# Altium PCB My_PCB.PcbDoc (part 2 of 2)
Units mil, origin at the board's own origin, x right, y up, seen from the top; angles counter-clockwise.
Board outline 2405.51 x 3023.62 mil, 6 copper layers (L1 HS signal, L2 GND, L3 Signal, L4 5V, L5 Signal, L6 Signal), stack 61.068 mil thick; 56 components, 70 nets, 272 pads, 60 vias.
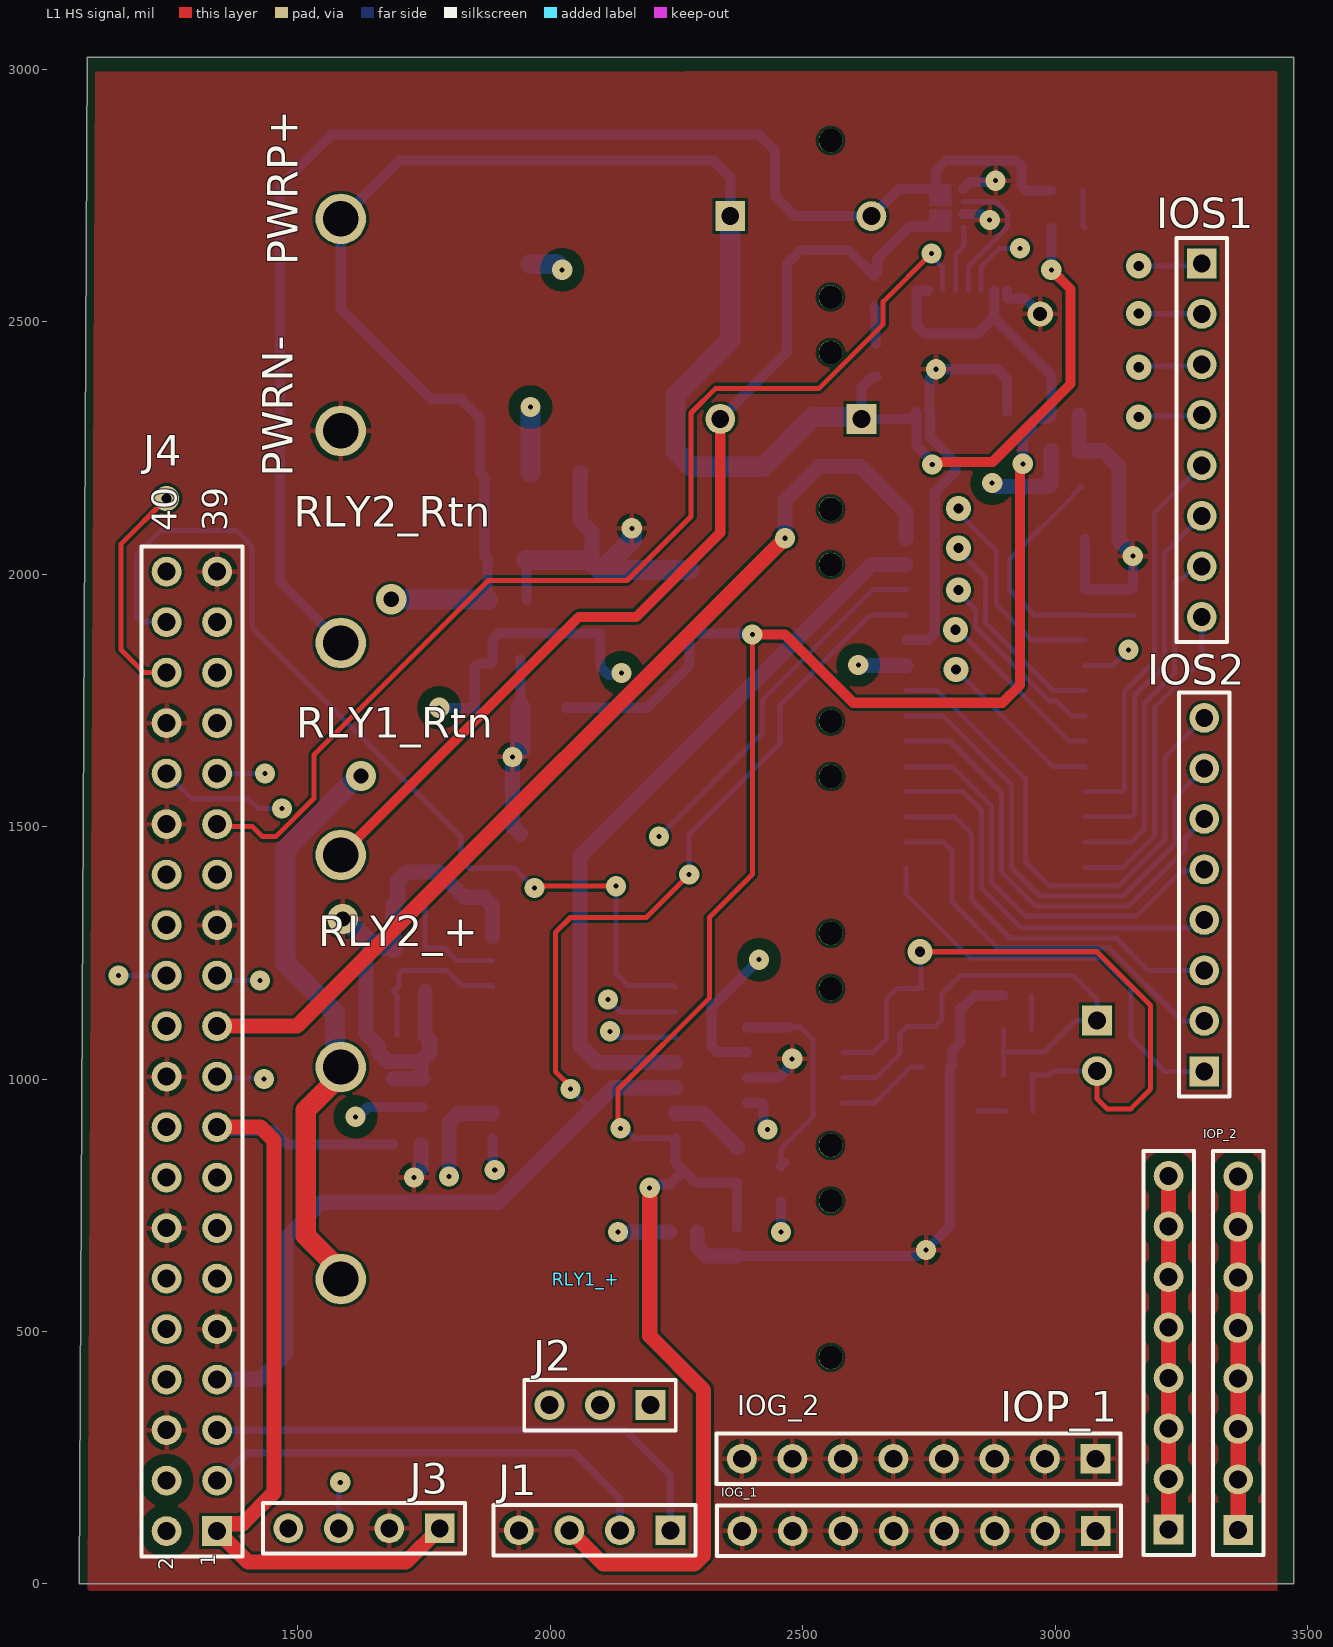
[diagram p0: L1 HS signal view]

## Part data (continued)
UC2: library part CMP-0186-00038-2, "High-Speed CAN Transceiver, 8-Pin SOIC, Extended Temperature", Code_IPC=SOIC127P600-8, Code_JEDEC=MS-012, ComponentLink1Description="Manufacturer URL", ComponentLink1URL=http://www.microchip.com/, ComponentLink2Description=Datasheet, ComponentLink2URL=http://ww1.microchip.com/downloads/en/DeviceDoc/21667F.pdf, ComponentLink3Description="Package Specification", ComponentLink3URL=http://www.microchip.com/stellent/groups/techpub_sg/documents/packagingspec/en012702.pdf, DatasheetVersion="revF, Jul-2010", PackageDescription="8-Lead Plastic Small Outline (SN) - Narrow, 3.90mm Body [SOIC]", PackageReference=SOIC-SN8, PackageVersion="revBB, Aug-2009", RevisionNote="URLs added. DatasheetVersion updated."
UI1: library part CMP-0186-00131-2, "16-Bit I/O Expander with Serial Interface, 28-Pin SOIC, Extended Temperature, Tape and Reel", Code_JEDEC=MS-013, ComponentLink1Description="Manufacturer URL", ComponentLink1URL=http://www.microchip.com/, ComponentLink2Description=Datasheet, ComponentLink2URL=http://ww1.microchip.com/downloads/en/DeviceDoc/21952b.pdf, ComponentLink3Description="Package Specification", ComponentLink3URL=http://www.microchip.com/stellent/groups/techpub_sg/documents/packagingspec/en012702.pdf, DatasheetVersion="revB, Feb-2007", PackageDescription="28-Lead Plastic Small Outline (SO) - Wide 7.50mm Body [SOIC]", PackageReference=SOIC-SO28, PackageVersion="revBB, Aug-2009", RevisionNote="URLs added. Sch pin type corrected."
X1: library part CMP-0464-00001-2, "Crystal, 16 MHz, -30 to 85 degC, 3.2 x 2.5 x 0.9 mm SMD", Frequency Tolerance="+/-20 ppm", Load Capacitance="10 pF", Manufacturer=ITTI, Nominal Frequency="16 MHz", Operating Temperature="-30 to 85 degC", ComponentLink1Description="Manufacturer URL", ComponentLink1URL=http://www.itti-co.com, Drive Level="100 max. uw", Mounting Technology="Surface Mount", Overtone order=Fundamental, PackageDescription="4-Pin Hand Drawn, Body 3.2 x 2.5mm", PackageReference=21C00047-16.000MHz-4, PartNumber=21C00047-16.000MHz

## Via types
v1: diameter 40, hole 10, L1 HS signal to L6 Signal, 45 vias
v2: diameter 50, hole 20, L1 HS signal to L6 Signal, 11 vias
v3: diameter 60, hole 30, L1 HS signal to L6 Signal, 3 vias
v4: diameter 50, hole 28, L1 HS signal to L6 Signal, 1 vias

## Nets (pads, with @x,y where several pads share a name; then routed paths per layer and width w, separated by ;. In a path a pad name is that pad's centre, name@x,y a point inside that pad or via, vN(x,y) a via of type N, cw(c..) or ccw(c..) an arc to the next point about the centre after c; other vN are vias at no path point)
3V3: C1.2 C6.2 C7.1 C33.2 J1.3 J3.1 J4.1 J4.17 R1.2 Reg3.3 U1.1 U1.2 U1.7 UC1.18 | length 6984.3
  L1 HS signal w10: v1(2138.99,902.44) 2134.14,907.29 2134.14,979.14 2315,1160 2315,1320 2400,1405 v1(2400,1880)
  L1 HS signal w20: v1(2400,1880) 2465,1880 2600,1745 2895,1745 2930,1780 2930,2212.61 v1(2935.67,2218.28)
  L1 HS signal w30: J4.17 1425.98,904.72 1452.76,877.95 1452.76,181.1 1390.91,119.25 1354.69,119.25 J4.1 1401.57,43.31 1714.17,43.31 J3.1 ; J1.3 2104.72,39.37 2285.58,39.37 2303.15,56.94 2303.15,384.47 2196.85,490.77 v1(2196.85,784.5)
  L3 Signal w20: J3.1 1848.03,43.31 1988.19,43.31 2002.33,57.45 2002.33,60.27 2037.8,95.73 J1.3
  L6 Signal w10: v1(2138.99,902.44) 2147.11,902.44 2166.87,882.68 UC1.18
  L6 Signal w20: J4.17 1347.24,897.64 1452.76,897.64 1480.31,870.08 C6.2 ; Reg3.3 2191.93,1735.24 2275.59,1818.9 C7.1 2398.11,1881.89 v1(2400,1880) ; v1(2196.85,784.5) 2196.85,791.34 2236.22,791.34 2263.78,818.9 ; UC1.18 2248.03,834.65 2263.78,818.9 ; C33.2 R1.2 2287.4,795.28 2263.78,818.9 ; U1.2@2747.72,2561.02 U1.1 2725.39,2491.14 2740.16,2476.38 2846.46,2476.38 2877.95,2507.87 ; U1.7 2878.94,2508.86 2877.95,2507.87 ; v1(2935.67,2218.28) 2935.67,2270.67 2955,2290 2955,2303.24 2959,2307.24 2988.35,2307.24 2992.13,2311.02 C1.2 2992.13,2393.7 2877.95,2507.87
5V: C2.2 C5.2 C8.1 C9.2 C51.2 IOP_1.1 IOP_1.2 IOP_1.3 IOP_1.4 IOP_1.5 IOP_1.6 IOP_1.7 IOP_1.8 IOP_2.1 IOP_2.2 IOP_2.3 IOP_2.4 IOP_2.5 IOP_2.6 IOP_2.7 IOP_2.8 J4.2 J4.4 R4.1 Reg3.1 Reg5.2 Reg5.4 UC2.3 UI1.9 | length 2878
  L1 HS signal w30: IOP_1.1 IOP_1.2 IOP_1.3 IOP_1.4 IOP_1.5 IOP_1.6 IOP_1.7 IOP_1.8 ; IOP_2.1 IOP_2.2 IOP_2.3 IOP_2.4 IOP_2.5 IOP_2.6 IOP_2.7 IOP_2.8
  L6 Signal w20: v1(1614.17,925.2) 1619.59,925.2 1639.27,944.88 C5.2 C51.2 ; v1(1780,1735) 1850.16,1735 Reg3.1 1850.39,1814.96 1858.42,1822.99 1882.05,1822.99 1885.83,1826.77 C9.2 1885.83,1870.08 1899.17,1883.43 1988.13,1883.43 1989.66,1881.89 C8.1 2098.43,1816.57 2115,1800 2115.46,1800.46 2136.89,1800.46 v1(2140.71,1804.29) ; UC2.3 2389.07,1053.25 2330.62,1053.25 2318.9,1064.97 2318.9,1141.73 v1(2413.39,1236.22)
  L6 Signal w30: v1(2610,1820) 2610.91,1819.09 UI1.9 ; v1(2875,2180) 2877.71,2180 2884.48,2173.23 R4.1 2987.12,2173.23 2992.12,2178.23 C2.2
  L6 Signal w40: Reg5.2 v1(1960.63,2330.71) ; Reg5.4 2011.81,2614.17 v1(2023.62,2602.36)
12V: C3.2 C4.2 DI1.2 DI2.2 PWRP+.1 Reg5.3 RL1.2 RL2.2 RLY1_+.1 RLY2_+.1 U1.16 | length 5475.5
  L1 HS signal w20: v1(2756.39,2217.02) 2760.97,2221.6 2875.14,2221.6 3030,2376.46 3030,2564.49 v1(2992.13,2602.36)
  L1 HS signal w40: RLY1_+.1 1585.12,620.06 1515.75,689.43 1515.75,938.1 1585.12,1007.47 RLY2_+.1
  L3 Signal w40: v3(1625,1600) 1685,1660 v3(1685,1950)
  L6 Signal w20: C3.2@1875.98,1948.82 1875.98,2025.59 C4.2 1869.29,2036.22 1869.29,2192.13 Reg5.3 1860.63,2308.66 1822.83,2346.46 1763.78,2346.46 1585.12,2525.12 PWRP+.1 1700.75,2818.9 2322.83,2818.9 2356.3,2785.43 DI2.2 ; RL1.2 2636.81,2389.76 2616.14,2369.09 DI1.2 2711.61,2307.09 U1.16@2722.13,2317.6 ; U1.16 2725.39,2253.44 2756.39,2222.44 v1(2756.39,2217.02) ; v1(2992.13,2602.36) RL2.2
  L6 Signal w40: RLY2_+.1 1573.64,1035.19 1573.64,1131.43 1475,1230.06 1475,1455 1620,1600 v3(1625,1600) ; v3(1685,1950) 1685.59,1949.41 1875.39,1949.41 C3.2@1875.98,1948.82 ; DI2.2 2356.3,2462.6 2248.03,2354.33 2248.03,2244.09 2279.53,2212.6 2421.26,2212.6 2519.69,2311.02 2612.2,2311.02 DI1.2
AUX_CL: J2.1
AUX_DA: J2.3
C\S\: J3.3 J4.24 | length 1483.9
  L3 Signal w10: v1(1145,1205) 1145,990 1180,955 1369.14,955 1400,924.14 1400,385.48 v1(1584.07,201.42)
  L6 Signal w10: v1(1145,1205) 1145.14,1204.86 1240.02,1204.86 J4.24 ; J3.3 1581.1,198.46 v1(1584.07,201.42)
CAN_RXD: R2.2 R3.1 UC1.2 | length 1151.1
  L3 Signal w20: v1(2133.86,696.85) 2208.66,622.05 2417.32,622.05 2456.69,661.42 v1(2456.69,696.85)
  L3 Signal w30: v1(1799.21,807.09) 1909.45,696.85 v1(2133.86,696.85)
  L6 Signal w20: v1(2456.69,696.85) R3.1
  L6 Signal w30: v1(1799.21,807.09) 1799.21,913.39 1817.28,931.46 1884.61,931.46 UC1.2 ; v1(2133.86,696.85) R2.2
CAN_TXD: UC1.1 UC2.1 | length 724.6
  L3 Signal w20: v1(1890,820) 2350,820 v1(2430,900)
  L6 Signal w20: UC1.1 1885.83,824.17 v1(1890,820) ; UC2.1 2420.28,952.56 2421.95,950.89 2421.95,913.46 2430,905.41 v1(2430,900)
CANH: DioCAN1.1 P1.1 RCH1.2 RT1.2 UC2.7 | length 1003.5
  L6 Signal w10: UC2.7 2644.29,1002.56 2692.91,1051.18 2692.91,1090.55 2706.69,1104.33 DioCAN1.1 2761.81,1104.33 2775.59,1118.11 2775.59,1169.29 2811.02,1204.72 3035.43,1204.72 3082.68,1157.48 P1.1 3040.94,1115.75 2978.35,1053.15 2897.64,1053.15 ; RT1.2 2897.64,1053.15 ; RCH1.2 2897.64,1053.15
CANL: DioCAN1.2 P1.2 RCL1.2 RT1.1 UC2.6 | length 1388.1
  L1 HS signal w10: v2(2732.28,1251.97) 3082.68,1251.97 3188.98,1145.67 3188.98,980.32 3149.61,940.94 3102.36,940.94 3082.68,960.63 P1.2
  L6 Signal w10: UC2.6 2639.17,1052.56 2665.35,1078.74 2665.35,1157.48 2687.01,1179.13 DioCAN1.2 2734.25,1181.1 2734.25,1250 v2(2732.28,1251.97) ; RCL1.2 2954.73,938.98 2954.73,1005.9 RT1.1 2988.19,1007.87 2996.06,1015.75 P1.2
CLK_N: J1.1 J4.5 | length 1043.5
  L6 Signal w15: J4.5 2148.03,304.72 2237.8,214.96 J1.1
CLK_P: J1.2 J4.3 | length 921.1
  L6 Signal w15: J4.3 1343.41,204.72 1398.69,260 2047.09,260 2137.8,169.29 J1.2
FSYNC: J2.2
GND: C1.1 C2.1 C3.1 C4.1 C5.1 C6.1 C7.2 C8.2 C9.1 C33.1 C51.1 CH1.2 CL1.1 CO1.1 CO2.2 Crst1.1 DioCAN1.3 IOG_1.1 IOG_1.2 IOG_1.3 IOG_1.4 IOG_1.5 IOG_1.6 IOG_1.7 IOG_1.8 IOG_2.1 IOG_2.2 IOG_2.3 IOG_2.4 IOG_2.5 IOG_2.6 IOG_2.7 IOG_2.8 J1.4 J3.2 J4.6 J4.9 J4.14 J4.20 J4.25 J4.30 J4.34 J4.39 PWRN-.1 Q1.1 Q1.3 R2.1 RCAN1.1 Reg3.2 Reg3.4 Reg5.1 U1.8 U1.9 U1.15 UC1.9 UC2.2 UI1.10 UI1.15 UI1.16 UI1.17 X1.2 X1.4 | length 5142
  L6 Signal w20: X1.2@1751.97,1169.29 X1.2 ; Reg3.2 C9.1 ; C3.1 C4.1 ; C33.1 2726.87,649.61 2738.68,661.42 v1(2744.09,661.42) 2791.34,708.66 CL1.1 RCAN1.1 2795.12,1027.4 2795.12,1054.96 2811.02,1070.87 2811.02,1137.8 2811.18,1137.95 2811.18,1139.92 2812.99,1141.73 DioCAN1.3 2816.93,1141.73 2840.55,1165.35 CH1.2 ; UC2.2 2390.46,1003.25 2452.8,1003.25 2479,1029.45 v1(2479,1040) ; UI1.10 2705.42,1869.79 2748.43,1869.79 2761.26,1882.62 2761.26,2162.84 2802.74,2204.31 2802.74,2220.88 2752.13,2271.5 2752.13,2319.73 U1.15 2750.98,2387.3 2763.78,2400.1 v1(2763.78,2405.51) 2885.83,2405.51 2904.53,2386.81 U1.9 ; Q1.3 2852.86,2712.6 2864.67,2700.79 v1(2870.08,2700.79) v1@2870.08,2704.72 ; Q1.1 2831.89,2776.69 2879.68,2776.69 v1(2881.89,2778.9) ; U1.8 2904.53,2546.88 2905.67,2545.74 2939.26,2545.74 v4(2970,2515) ; UI1.15 UI1.16 UI1.17 3059.75,1969.79 3150.89,1969.79 Crst1.1 v1(3153.54,2035.43)
  L6 Signal w30: C5.1 C51.1 1746.54,1000 1745.31,1001.22 1745.31,1002.72 1743.58,1004.45 1743.58,1035 ; X1.4 1652.57,1259.84 1635,1242.27 1635,1090 1660,1065 1660,1052.57 1677.57,1035 1743.58,1035 ; X1.4@1688.98,1263.78 1688.98,1344.96 1696.85,1352.83 CO2.2 1698.07,1355.55 1698.07,1392.43 1715.64,1410 1780,1410 1830,1360 1868.25,1360 1885.83,1342.43 UC1.9 ; v1(1730,805) 1730,807.71 1744.1,821.8 C6.1 ; X1.2 1751.97,1169.29 CO1.1 1761.16,1077.43 1761.16,1052.57 1743.58,1035 ; v1(1925.2,1637.8) 1925.2,1500.98 Reg3.4 ; Reg5.1 2059.06,2199.21 2059.06,2106.3 2082.68,2082.68 C8.2@2082.68,2023.62 ; R2.1 2291.34,667.18 2308.91,649.61 C33.1 ; C1.1 C2.1 3094.49,2244.09 3125.98,2212.6 3125.98,2065.7 3153.54,2038.14 v1(3153.54,2035.43)
  L6 Signal w40: v3(1589,1317) 1594.41,1317 1644.01,1267.4 1685.35,1267.4 1688.98,1263.78 X1.4 ; v1(1925.2,1637.8) 1940.94,1653.54 Reg3.2 ; C4.1 2074.8,2027.56 C8.2@2078.74,2023.62 ; v1(2161.42,2090.55) 2161.42,2066.93 2102.36,2007.87 C8.2 C7.2
GPIO4: J4.7 UC1.16 UI1.11 | length 2707.4
  L1 HS signal w10: v1(2040,980) 2040,985 2010,1015 2010,1290 2040,1320 2190,1320 v1(2275,1405)
  L6 Signal w10: v1(2040,980) 2080.87,939.13 ; v1(2275,1405) 2275,1485 2455,1665 2455,1740 2634.09,1919.09 UI1.11
  L6 Signal w30: J4.7 1340.94,405.51 1425.2,405.51 1476.38,456.69 1476.38,685.04 1547.24,755.91 1897.64,755.91 2080.87,939.13 2124.41,982.68 UC1.16
GPIO7: J4.26
GPIO12: J4.32 UI1.20 | length 2162.8
  L3 Signal w10: v1(1468.5,1535.43) 2614.17,1535.43 2928.68,1849.94 v1(3145.15,1849.94)
  L6 Signal w10: J4.32 1289.88,1555 1401.69,1555 1421.26,1535.43 v1(1468.5,1535.43) ; UI1.20 3114.31,1819.09 v1(3145.15,1849.94)
GPIO13: J4.33
GPIO14: J4.8
GPIO15: J4.10
GPIO16: J4.36 UI1.19 | length 2488.3
  L1 HS signal w10: J4.36 1195.28,1804.72 1149.61,1850.39 1149.61,2059.06 v2(1240.16,2149.61)
  L3 Signal w10: v2(1240.16,2149.61) 2440.94,2149.61 2488.19,2196.85 2733.43,2196.85 2800.36,2129.92 v2(2808.22,2129.92)
  L6 Signal w10: v2(2808.22,2129.92) 2808.22,2121.64 2807.86,2121.28 2883.86,2045.28 2883.86,1938.98 2953.74,1869.09 UI1.19
GPIO17: J4.11
GPIO18: J4.12
GPIO19: J4.35
GPIO20: J4.38 UC1.12 | length 1876.5
  L1 HS signal w10: v1(1968.5,1377.95) 1972.44,1381.89 v1(2129.92,1381.89)
  L6 Signal w10: J4.38 1239.37,1905.51 1188.98,1905.51 1181.1,1913.39 1181.1,2039.37 1228.35,2086.61 1377.95,2086.61 1409.45,2055.12 1409.45,1893.7 1822.83,1480.32 1822.83,1433.07 1838.58,1417.32 1929.13,1417.32 v1(1968.5,1377.95) ; v1(2129.92,1381.89) 2129.92,1208.66 2153.54,1185.04 2245.67,1185.04 UC1.12
GPIO22: J4.15
GPIO23: J4.16
GPIO24: J4.18
GPIO25: J4.22
GPIO26: J4.37
GPIO27: J4.13
ID_SC: J4.28
ID_SD: J4.27
INT: J3.4
IOA_0: IOS1.1 UI1.21 | length 1341.2
  L3 Signal w10: v2(2808.22,2051.18) 2852.54,2051.18 2989.14,2187.78 2995,2193.64 2995,2243.03 3059.06,2307.09 3059.06,2604.38 3064.91,2610.24 v2(3165.35,2610.24)
  L6 Signal w10: v2(2808.22,2051.18) 2808.22,2046.11 2861.89,1992.44 2861.89,1903.5 2996.29,1769.09 UI1.21 ; v2(3165.35,2610.24) 3285.24,2610.24 IOS1.1
IOA_1: IOS1.2 UI1.22 | length 1237.9
  L3 Signal w10: v2(2808.22,1968.5) 2808.22,1973.57 3090.55,2255.91 3090.55,2509.89 3096.41,2515.75 v2(3165.35,2515.75)
  L6 Signal w10: v2(2808.22,1968.5) 2808.22,1963.44 2841.89,1929.76 2841.89,1895.21 2988.01,1749.09 3001.5,1749.09 3031.5,1719.09 UI1.22 ; v2(3165.35,2515.75) 3165.73,2515.37 3289.63,2515.37 IOS1.2
IOA_2: IOS1.3 UI1.23 | length 1181.1
  L3 Signal w10: v2(2802.28,1889.64) 2802.4,1889.76 2803.15,1889.76 3118.11,2204.72 3118.11,2411.46 3123.97,2417.32 3133.97,2417.32 3134.19,2417.1 3157.7,2417.1 v2(3165.35,2409.45)
  L6 Signal w10: v2(2802.28,1889.64) 2807.26,1889.64 3027.81,1669.09 UI1.23 ; v2(3165.35,2409.45) 3168.13,2412.22 3287.22,2412.22 IOS1.3
IOA_3: IOS1.4 UI1.24 | length 1111.7
  L3 Signal w10: v2(2803.15,1811.02) 3165.35,2173.23 v2(3165.35,2311.02)
  L6 Signal w10: v2(2803.15,1811.02) 2995.08,1619.09 UI1.24 ; v2(3165.35,2311.02) 3167.34,2313.01 3288.01,2313.01 IOS1.4
IOA_4: IOS1.5 UI1.25 | length 783.8
  L6 Signal w10: UI1.25 3131.12,1569.09 3136.98,1574.95 3136.98,1767.63 3196.22,1826.87 3196.22,2121.22 IOS1.5
IOA_5: IOS1.6 UI1.26 | length 745.2
  L6 Signal w10: UI1.26 3059.65,1519.68 3151.12,1519.68 3156.98,1525.54 3156.98,1759.34 3216.22,1818.58 3216.22,2041.22 IOS1.6
IOA_6: IOS1.7 UI1.27 | length 708.4
  L6 Signal w10: UI1.27 3150.2,1469.09 3176.98,1495.88 3176.98,1744.63 3236.22,1803.87 3236.22,1984.25 3243.44,1991.47 3253.2,1991.47 3276.73,2015 IOS1.7
IOA_7: IOS1.8 UI1.28 | length 635.6
  L6 Signal w10: UI1.28 3134.18,1419.09 3196.98,1481.89 3196.98,1736.35 3290,1829.37 IOS1.8
IOB_0: IOS2.1 UI1.1 | length 847.4
  L1 HS signal w10: IOS2.1@3294.25,1015.75 IOS2.1
  L6 Signal w10: UI1.1 2704.72,1366.14 2831.65,1239.21 3091.5,1239.21 3149.61,1181.1 3149.61,1082.68 3217.28,1015 IOS2.1
IOB_1: IOS2.2 UI1.2 | length 796.9
  L6 Signal w10: UI1.2 2778.94,1469.09 2795.28,1452.76 2795.28,1350.39 2886.46,1259.21 3106.93,1259.21 3251.14,1115 IOS2.2
IOB_2: IOS2.3 UI1.3 | length 792.3
  L6 Signal w10: UI1.3 2799.8,1519.09 2833.7,1485.2 2833.7,1355.28 2909.76,1279.21 3120.16,1279.21 3184.38,1215 IOS2.3
IOB_3: IOS2.4 UI1.4 | length 798.5
  L6 Signal w10: UI1.4 2816.73,1569.09 2853.7,1532.13 2853.7,1378.58 2933.07,1299.21 3265.94,1299.21 3281.73,1315 IOS2.4
IOB_4: IOS2.5 UI1.5 | length 839.5
  L6 Signal w10: UI1.5 2705.71,1618.11 2796,1618.11 2873.7,1540.41 2873.7,1390.08 2941.26,1322.52 3161.1,1322.52 3250.47,1411.89 3291.89,1411.89 IOS2.5
IOB_5: IOS2.6 UI1.6 | length 903
  L6 Signal w10: UI1.6 2704.92,1669.29 2791.34,1669.29 2893.7,1566.93 2893.7,1409.45 2960.63,1342.52 3145.67,1342.52 3256.98,1453.83 3256.98,1476.98 IOS2.6
IOB_6: IOS2.7 UI1.7 | length 992.7
  L6 Signal w10: UI1.7 2776.97,1719.09 2913.7,1582.36 2913.7,1417.73 2968.91,1362.52 3134.17,1362.52 3236.98,1465.33 3236.98,1556.98 IOS2.7
IOB_7: IOS2.8 UI1.8 | length 1080.3
  L6 Signal w10: UI1.8 2766.34,1769.09 2940.94,1594.49 2940.94,1429.76 2988.19,1382.52 3125.89,1382.52 3216.98,1473.61 3216.98,1636.98 IOS2.8
NetCH1_1: CH1.1 RCH1.1 | length 66.9
  L6 Signal w10: RCH1.1 CH1.1
NetCL1_2: CL1.2 RCL1.1 | length 55.1
  L6 Signal w10: CL1.2 RCL1.1
NetCO1_2: CO1.2 UC1.7 X1.3 | length 332
  L6 Signal w10: CO1.2 1696.85,1165.35 X1.3 1700,1184.25 1700,1209.14 1705.86,1215 1795,1215 1825,1185 1883.5,1185 UC1.7
NetCO2_1: CO2.1 UC1.8 X1.1 | length 239.6
  L6 Signal w10: CO2.1 X1.1 1790.16,1259.84 1815,1235 1883.5,1235 UC1.8
NetCrst1_2: Crst1.2 R4.2 UI1.18 | length 530.9
  L6 Signal w10: R4.2 3051.68,2173.23 3036.68,2158.23 3036.68,2156.23 2909.45,2028.99 2909.45,1968.5 2958.86,1919.09 UI1.18 3059.94,1918.21 3152.66,1918.21 Crst1.2
NetD1_1: D1.1 DI1.1 Q1.5 Q1.6 RLY1_Rtn.1 | length 1987.2
  L1 HS signal w20: RLY1_Rtn.1 2056.52,1915 2170,1915 2336.61,2081.61 DI1.1
  L6 Signal w20: DI1.1 2468.5,2438.98 2468.5,2614.17 2496.06,2641.73 2590.55,2641.73 D1.1 2647.48,2596.3 2647.48,2623.86 2711.22,2687.6 Q1.5
NetD1_2: D1.2 RL1.1 | length 72.5
  L6 Signal w20: D1.2 2643.7,2525.59 2643.7,2458.66 RL1.1
NetD2_1: D2.1 DI2.1 Q1.7 Q1.8 RLY2_Rtn.1 | length 2758.7
  L6 Signal w20: RLY2_Rtn.1 1464.57,1984.04 1464.57,2767.72 1566.93,2870.08 2413.39,2870.08 2444.88,2838.58 2444.88,2748.03 2484.25,2708.66 DI2.1 2689.76,2762.6 Q1.8 2763.78,2799.21 2783.46,2818.9 2921.26,2818.9 2933.07,2807.09 2933.07,2767.72 2940.94,2759.84 D2.1
NetD2_2: D2.2 RL2.1 | length 76.4
  L6 Signal w10: D2.2 3055.12,2688.98 RL2.1
NetQ1_2: Q1.2 U1.5 | length 282.8
  L6 Signal w10: Q1.2 2882.77,2737.6 2905.08,2715.28 2905.08,2686.29 2827.76,2608.97 U1.5
NetQ1_4: Q1.4 U1.4 | length 134
  L6 Signal w10: U1.4 2802.16,2632.87 2818.9,2649.61 2818.9,2686.5 Q1.4
NetR1_1: R1.1 UC1.17 | length 152
  L6 Signal w30: UC1.17 2249.25,931.46 2303.9,931.46 2370.08,865.28 R1.1
NetR3_2: R3.2 UC2.4 | length 428.1
  L6 Signal w10: R3.2 2456.69,861.69 2520,925 2520,1078 2495.44,1102.56 2472.24,1102.56
  L6 Signal w20: UC2.4 2472.24,1102.56 ; R3.2 R3.2@2463.95,834.02
NetRCAN1_2: RCAN1.2 UC2.8 | length 186.9
  L6 Signal w10: UC2.8 2641.54,952.56 2712.6,1023.62 RCAN1.2
RELAY1: J4.29 U1.3 | length 2183.2
  L1 HS signal w10: J4.29 1344.88,1500 1410,1500 1430,1480 1456.2,1480 1532.21,1556.01 1532.21,1642.21 1877.2,1987.2 2152.03,1987.2 2278.83,2114 2278.83,2318.83 2327.61,2367.61 2532.43,2367.61 2659.23,2494.41 2659.23,2539.23 v1(2755,2635)
  L6 Signal w10: v1(2755,2635) 2755,2629.09 2776.57,2607.52 U1.3
RELAY2: J4.31 U1.6 | length 2976.3
  L3 Signal w10: v1(1435,1605) 1435,2015 1370,2080 1205,2080 1170,2115 1170,2165 1670.5,2665.5 2901.38,2665.5 2921.88,2645 v1(2930,2645)
  L6 Signal w10: J4.31 1340.3,1604.86 1434.86,1604.86 v1(1435,1605) ; U1.6 2853.35,2608.35 2890,2645 v1(2930,2645)
SPI_MISO: J4.21 UI1.14 | length 1957.7
  L1 HS signal w30: J4.21 1498.43,1104.72 1596.35,1202.65 v1(2464.57,2070.87)
  L6 Signal w30: v1(2464.57,2070.87) 2464.57,2145.67 2531.5,2212.6 2614.17,2212.6 2704.72,2122.05 UI1.14
SPI_MOSI: J4.19 UC1.14 | length 953.9
  L3 Signal w10: v1(1433.07,1000) 1527.56,1094.49 v1(2118.11,1094.49)
  L6 Signal w10: J4.19 1342.52,1002.36 1430.71,1002.36 v1(1433.07,1000) ; v1(2118.11,1094.49) 2129.92,1082.68 UC1.14
SPI_MOSIA: UC1.15 UI1.13 | length 1462.3
  L6 Signal w30: UC1.15 2093.31,1032.68 2059.06,1066.93 2059.06,1440.94 2637.2,2019.09 UI1.13
SPI_SCLK: J4.23 UC1.13 UI1.12 | length 2032.4
  L3 Signal w10: v1(1425,1195) 1478.23,1195 1515.75,1157.48 v1(2114.17,1157.48) 2114.17,1269.89 2180,1335.71 2180,1440 2215,1475 v1(2215,1480)
  L6 Signal w10: J4.23 1349.88,1195 v1(1425,1195) ; v1(2114.17,1157.48) 2138.98,1132.68 UC1.13 ; v1(2215,1480) 2420,1685 2420,1750 2639.09,1969.09 UI1.12
pads on no net: J4.40 PWRN-.MH PWRP+.MH RLY1_+.MH RLY1_Rtn.MH RLY2_+.MH RLY2_Rtn.MH U1.10 U1.11 U1.12 U1.13 U1.14 UC1.3 UC1.4 UC1.5 UC1.6 UC1.10 UC1.11 UC2.5

## Polygon pours and split planes (outlines as drawn)
GND on L1 HS signal "GND_L01_P000" (solid, pour order 0): 1099.02,2995.04 1084.27,-13.66 3439.27,-13.66 3439.27,2997.05
GND on L6 Signal "GND_L06_P001" (solid, pour order 1): 3447,3001.01 3447,27 3446,26 3445,27 1092,27 1108,2982 1108,2999.01
5V on L4 5V (split plane): 3452.34,20.1 1087.13,20.1 1102.86,3003.53 3452.34,3003.53
GND on L2 GND (split plane): 3452.34,20.1 1087.13,20.1 1102.86,3003.53 3452.34,3003.53

## Text inside footprints (layer, text, board x,y; h text height)
J4: Top Overlay "1" at 1346,34 h50 r90; Top Overlay "2" at 1263,27 h50 r90; Top Overlay "40" at 1260.16,2084.72 h50 r90; Top Overlay "39" at 1360.16,2084.72 h50 r90